# EAGLE board sercon2 (EAGLE 3.55)
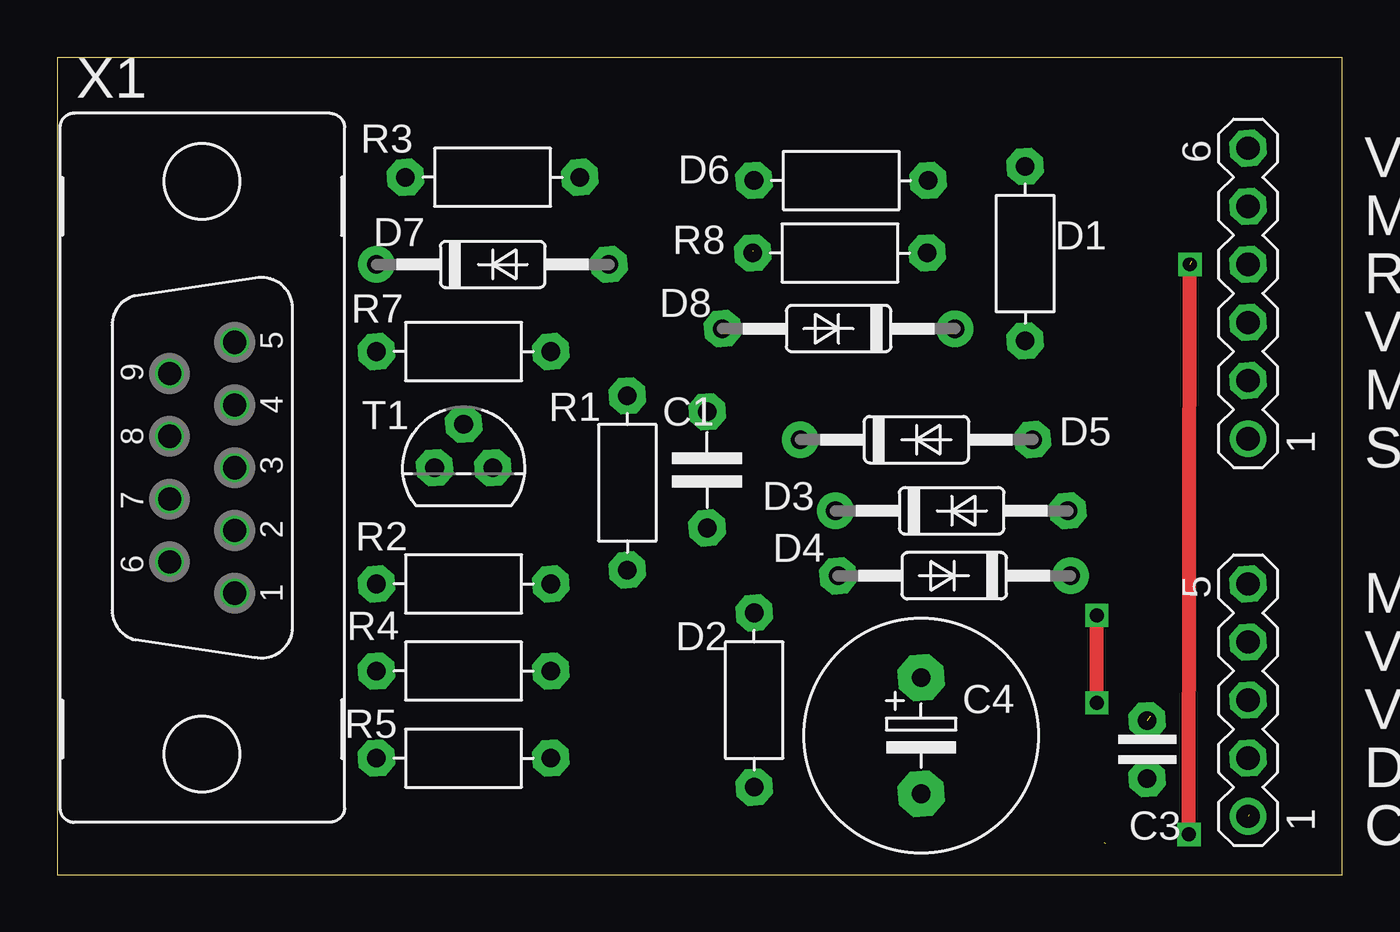
[diagram p0: board, top side]
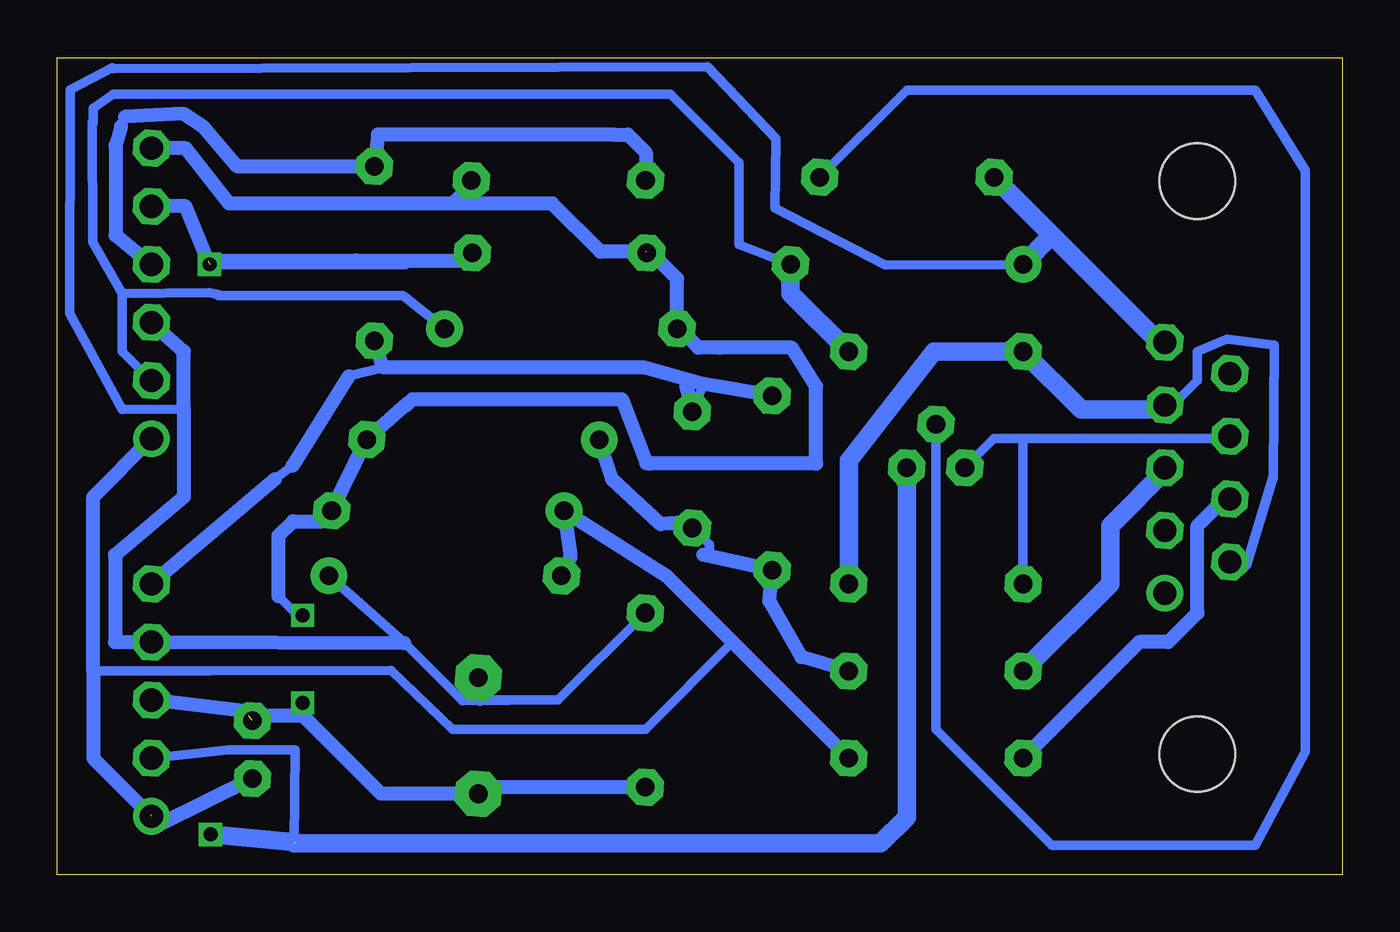
[diagram p1: board, bottom side, seen from below]

Size 56.17 x 35.72 mm. Coordinates in mm from the lower left corner, seen from the top.
Outline: 0,0 56.17,0 56.17,35.72 0,35.72 0,0
Copper layers used: Top, Bottom

## Footprints (pad centres in the part's own frame; a part is rotated, then mirrored left to right if it is on the bottom)
06-1 = drill 1.016 pad 1.6 round:  -6.35,0 | drill 1.016 pad 1.6 octagon:  -3.81,0;  -1.27,0;  1.27,0;  3.81,0;  6.35,0
5 = drill 0.813 pad 1.6 octagon:  -2.54,0;  2.54,0
2,5 = drill 0.813 pad 1.6 octagon:  -1.27,0;  1.27,0
-5 = drill 0.813 pad 2.007 octagon:  -2.54,0;  2.54,0
7,5 = drill 0.813 pad 1.6 octagon:  -3.81,0;  3.81,0
35-10 = drill 0.813 pad 1.6 round:  -5.08,0 | drill 0.813 pad 1.6 octagon:  5.08,0
05-1 = drill 1.016 pad 1.6 round:  -5.08,0 | drill 1.016 pad 1.6 octagon:  -2.54,0;  0,0;  2.54,0;  5.08,0
92 = drill 0.813 pad 1.6 octagon:  1.27,0;  0,1.905;  -1.27,0
9V = drill 1.016 pad 1.6 round:  5.486,1.422 | drill 1.016 pad 1.6 octagon:  2.743,1.422;  0,1.422;  -2.743,1.422;  -5.486,1.422;  4.115,-1.422;  1.372,-1.422;  -1.372,-1.422;  -4.115,-1.422 | hole 3.302: -12.522,0; 12.522,0

## Placement (x,y rotation side)
AVR  SV2  [06-1]  52.05,25.41 90 top
C1  100n  [5]  28.41,17.7 270 top
C3  1n  [2,5]  47.65,5.47 270 top
C4  100æ  [-5]  37.76,6.08 270 top
D1  8V2  [7,5]  42.31,27.15 270 top
D2  5V1  [7,5]  30.46,7.63 90 top
D3  1N4148  [35-10]  39.1,15.91 0 top
D4  1N4148  [35-10]  39.21,13.07 180 top
D5  1N4148  [35-10]  37.56,19.02 0 top
D6  5V1  [7,5]  34.27,30.35 180 top
D7  1N4148  [35-10]  19.03,26.68 0 top
D8  1N4148  [35-10]  34.16,23.87 180 top
PIC  SV1  [05-1]  52.05,7.63 90 top
R1  1k  [7,5]  24.93,17.13 270 top
R2  1k  [7,5]  17.76,12.71 180 top
R3  10k  [7,5]  19.03,30.49 0 top
R4  1k  [7,5]  17.76,8.9 0 top
R5  1k  [7,5]  17.76,5.09 180 top
R7  1k  [7,5]  17.76,22.87 0 top
R8  10k  [7,5]  34.22,27.18 0 top
T1  BC547  [92]  17.76,17.79 0 top
X1  F09V  [9V]  6.33,17.79 270 top

## Library data of the parts
AVR PIC = con-lstb
C1 C3 C4 D1 D2 D6 R1-R5 R7 R8 = discrete
D3-D5 D7 D8 = diode
T1 = npn
X1 = subd

## Nets
GND: AVR. C4. D2. D4. D7. PIC. R3. X1.
N$1: AVR. C3. C4. D2. D3. D5. D6. D8. PIC. R8.
N$2: R4. X1.
N$3: C1. D1. PIC. R1.
N$4: C1. D5. R1. R4.
N$5: R2. T1. X1.
N$7: R5. X1.
N$8: AVR. D1. D6.
N$9: R3. T1.
N$10: AVR. C3. D3. D4. PIC. R5.
N$11: AVR. PIC. R8. T1.
N$12: R2. R7. X1.
N$13: AVR. D7. D8. R7.

## Tracks (layer width: path | path; a pad name or v marks a point on that pad's centre or on a via)
GND
  Bottom 0.406: 7.76,23.28 7.6,22.87 | 34.27,7.63 D2. | 38.45,7.59 38.47,7.73 | 38.45,7.59 34.27,7.63 | 38.45,7.59 40.99,10.13 44.29,13.07 | 13.95,26.68 19.98,26.65 24.81,29.14 24.75,32.19 27.75,35.33 53.73,35.24 53.73,35.23 53.78,35.28 55.6,34.31 55.62,24.53 53.32,20.33 50.64,20.36 | 37.76,8.62 37.76,7.66 37.68,7.59 37.68,7.67 37.64,7.72 37.56,7.63 34.27,7.63
  Bottom 0.61: 40.99,10.13 52.05,10.17 53.64,10.17 53.64,13.98 50.64,16.52 50.64,20.36 50.64,22.87 52.05,24.14
  Bottom 0.813: 12.68,27.95 15.22,30.49 | 7.6,22.87 12.68,27.95 | 12.68,27.95 13.95,26.68
N$1  (via drill 0.61 pad 1.02)  (2 unrouted)
  Top 0.61: v45.44,7.51 v45.44,11.33
  Bottom 0.406: 48.06,7.17 48.03,7.17 47.8,6.94 | 37.8,3.54 37.81,3.52 | 37.8,3.54 C4. | 37.51,3.82 37.8,3.54 | 29.09,23.99 29.08,23.98 D8. | 30.35,27.33 30.41,27.27 30.41,27.18 | 37.92,30.3 37.97,30.35 38.08,30.35 | 39.36,29.34 38.88,29.34 | 45.42,6.94 45.42,7.49 v45.44,7.51 | v45.44,11.33 45.65,11.33 46.5,12.17 | D3. 44.14,15.87 44.56,15.45
  Bottom 0.61: 48.06,7.17 52.05,7.63 | D3. D5. 40.86,20.61 40.86,20.58 | AVR. 50.55,31.76 48.66,29.35 39.36,29.34 34.53,29.34 32.42,27.24 30.44,27.24 | C4. 42.02,3.54 45.42,6.94 47.8,6.94 | 30.46,3.82 37.51,3.82 | 29.08,23.98 28.14,23.04 27.22,23.04 24.07,23.04 23,21.36 23,17.98 30.3,17.98 30.33,18.01 30.36,17.98 30.42,17.98 31.49,20.78 40.65,20.78 40.86,20.58 | D8. 29.08,26.05 30.35,27.33 | 38.88,29.34 37.92,30.3 | 46.5,12.17 46.5,14.82 45.86,15.45 44.56,15.45 | 40.91,20.52 40.86,20.58
N$2
  Bottom 0.406: 7.6,17.79 7.76,17.79
  Bottom 0.813: 13.95,8.9 10.14,12.71 10.14,15.25 7.6,17.79
N$3
  Bottom 0.406: 45.89,17.89 46.65,17.29 | 41.92,22.18 43.43,21.79 | 28.53,20.38 28.67,21.32 28.45,20.1 27.93,21.45
  Bottom 0.61: 24.92,20.94 27.93,21.45 30.49,22.17 41.92,22.18 D1. | 46.65,17.29 PIC. | 43.43,21.79 45.89,17.89 | 28.67,21.32 28.41,20.24
N$4
  Bottom 0.406: 27.66,13.98 27.66,13.87 | 27.92,13.98 27.66,13.98 | 27.66,13.98 27.66,14.44 C1. 29.05,15.25 29.52,15.27 28.78,15.4 | 31.94,17.31 31.92,17.31
  Bottom 0.61: R4. 23.65,9.52 25.04,11.96 R1. 27.92,13.98 | 31.92,17.31 32.48,19.02 | 31.94,17.31 29.79,15.33 28.78,15.4
N$5
  Bottom 0.406: 13.95,19.06 15.22,19.06 T1. | 13.95,19.06 5.06,19.06 4.91,19.16 | 13.95,19.06 R2.
N$7
  Bottom 0.406: 5.06,16.52 4.91,16.42
  Bottom 0.61: R5. 8.87,10.17 7.6,10.17 6.33,11.44 6.33,15.25 5.06,16.52
N$8
  Bottom 0.406: 53.22,33.13 53.38,32.72 | 31.86,32.35 31.67,32.35 | 30.53,30.21 30.46,30.28 | 30.46,30.28 D6. | 30.44,30.3 30.46,30.28
  Bottom 0.61: 52.05,26.68 53.63,27.95 53.63,31.89 53.38,32.72 | 53.22,33.13 50.65,33.26 49.78,32.69 48.3,30.96 42.31,30.96 42.15,32.35 31.86,32.35 31.23,32.35 30.44,31.56 30.44,30.3
N$9
  Bottom 0.406: R3. 19.03,34.3 3.79,34.3 1.61,30.78 1.61,5.38 3.79,1.28 12.68,1.28 17.76,6.36 17.76,19.7
N$10  (1 unrouted)
  Bottom 0.406: 54.59,8.9 49.51,8.9 41.58,8.92 38.88,6.35 30.46,6.36 26.65,10.17 | 51.68,2.21 52.08,2.61
  Bottom 0.61: 52.05,2.55 54.59,5.09 54.59,8.9 54.59,16.52 52.05,19.06 | D4. 33.74,13.91 34.02,15.91 29.51,13.03 26.65,10.17 21.57,5.09 | C3. 51.68,2.21
N$11  (via drill 0.61 pad 1.02)  (2 unrouted)
  Top 0.61: v49.47,1.76 v49.51,26.68
  Bottom 0.406: 45.82,1.38 45.76,5.47 48.7,5.46 52.05,5.09 | v49.51,26.68 40.94,26.68 | 37.92,27.33 38.03,27.22 R8.
  Bottom 0.61: 52.05,29.22 50.57,29.22 49.56,26.83 43.11,26.85 38.31,26.85 38.03,27.13 38.03,27.22
  Bottom 0.813: 45.74,1.42 v49.47,1.76 | 19.03,17.79 19.03,2.52 20.19,1.36 45.68,1.36 45.77,1.45 45.82,1.39 45.82,1.38
N$12
  Bottom 0.406: 4.91,13.68 4.2,13.52 3.01,17.41 2.97,23.16 5.04,23.41 6.33,22.87 6.33,21.6 7.6,20.33 7.76,20.53
  Bottom 0.813: 21.57,12.71 21.57,18.11 17.85,22.87 13.95,22.87 11.41,20.33 7.6,20.33
N$13
  Bottom 0.406: 52.05,21.6 53.32,22.87 53.32,25.41 | 53.32,25.41 49.52,25.44 49.06,25.33 49.15,25.33 | 39.24,23.87 41.06,25.31 49.13,25.31 49.15,25.33 | D7. 26.38,27.54 26.38,31.12 29.37,34.11 53.73,34.11 54.6,33.51 54.6,32.86 54.63,32.9 54.64,32.9 54.63,27.65 53.32,25.41 | 49.2,25.38 49.15,25.33
  Bottom 0.813: R7. 24.11,25.41 D7.

## Text on the board
tPlace: VSS | MISO | RESET | VDD | MOSI | SCK | MCLR | VDD | VSS | DATA | CLK